# Altium PCB ESP32 with USBC.PcbDoc (part 1 of 3)
Units mil, origin at the board's own origin, x right, y up, seen from the top; angles counter-clockwise.
Board outline 2700 x 1000 mil, 4 copper layers (L1, L2, L3, L4), stack 61.583 mil thick; 64 components, 73 nets, 299 pads, 161 vias.
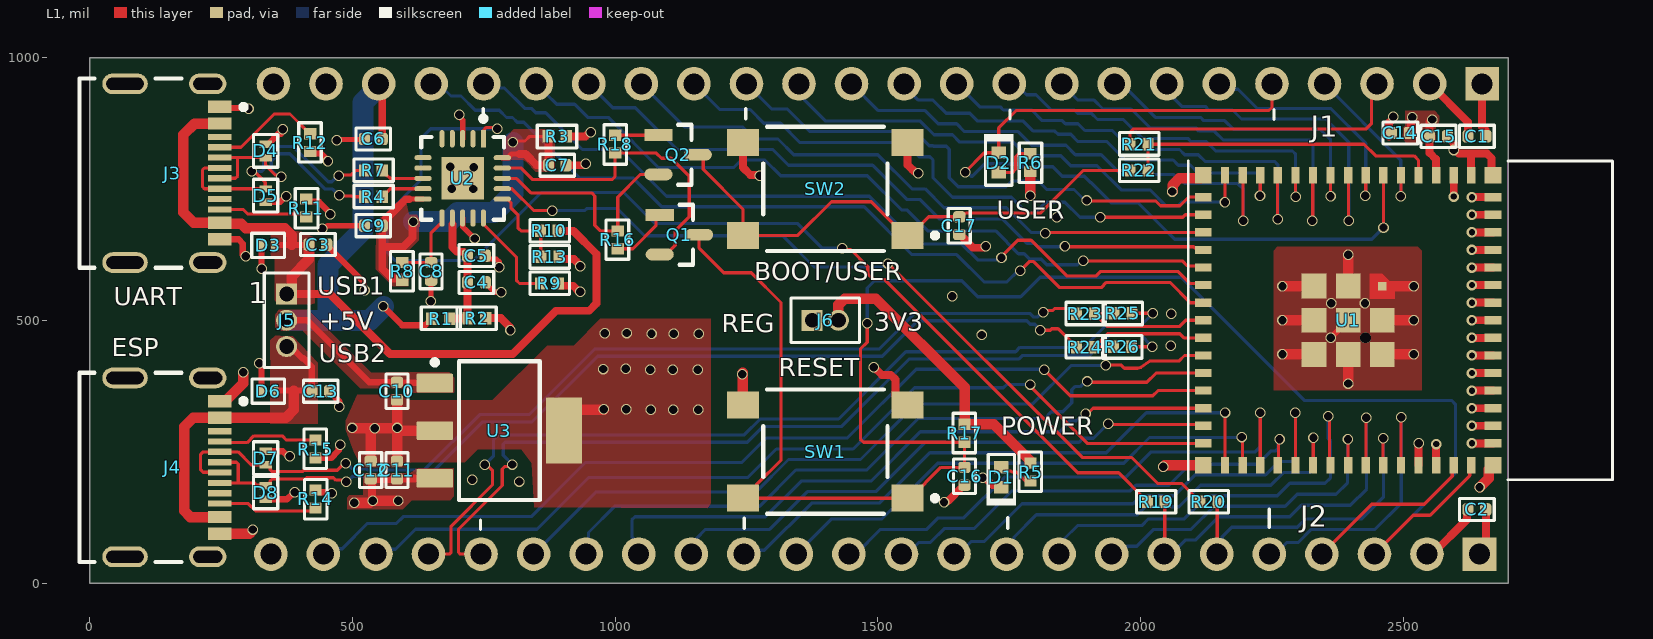
[diagram p0: L1 view]
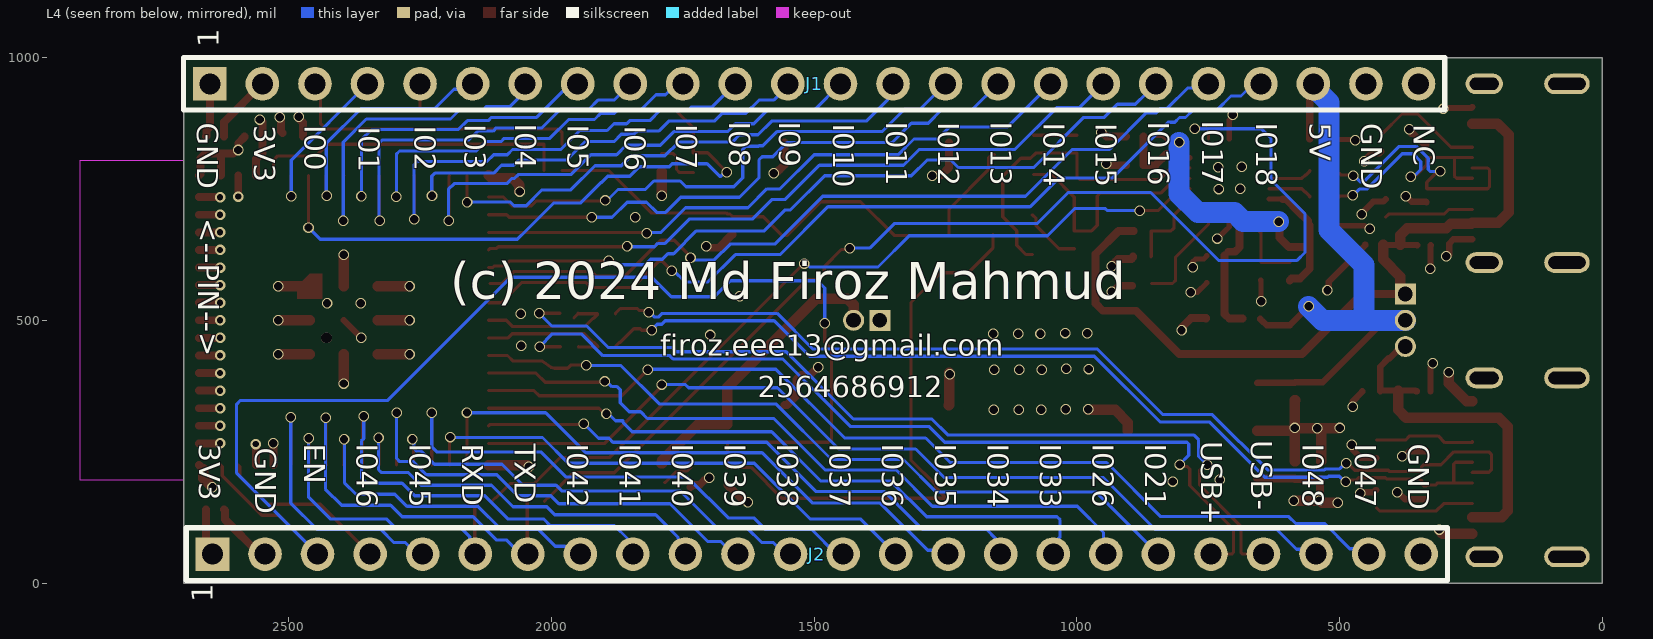
[diagram p1: L4 view, seen from below]
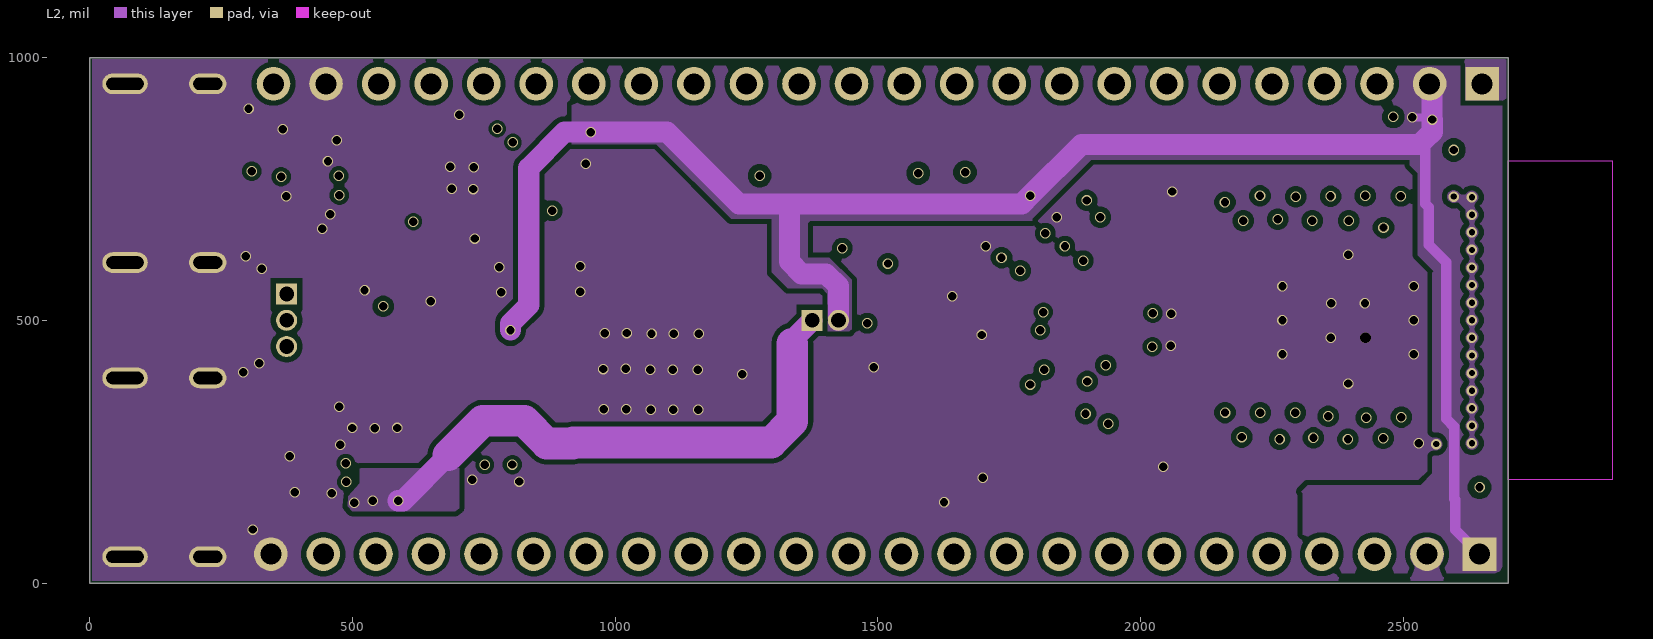
[diagram p2: L2]
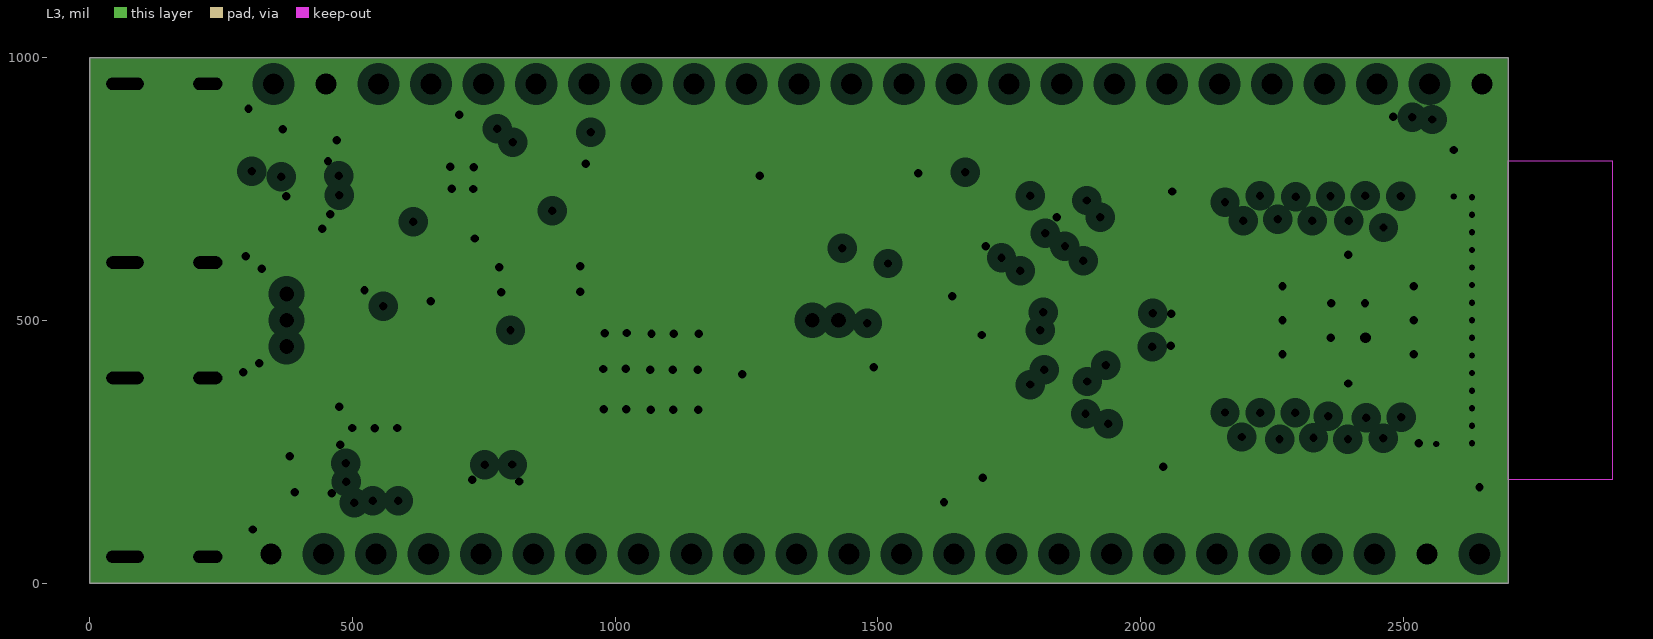
[diagram p3: L3, clearances drawn from the general rule]
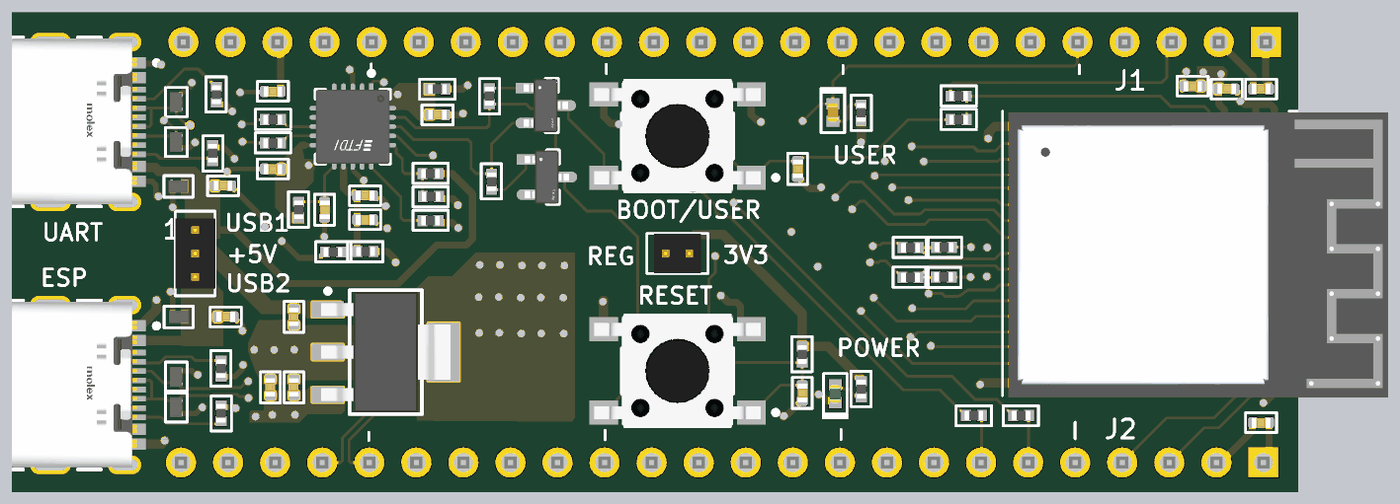
[diagram p5: 3D render of the assembled board from above, using the file's embedded part models]

## Layer stack, top to bottom
Top Solder: solder mask 0.4, Solder Resist, Dk 3.5
L1: signal copper 1.378
Dielectric 2: prepreg 3.9134, PP-006, Dk 4.1
L2: signal copper 0.5984
Dielectric 1: dielectric 49.8031, FR-4, Dk 4.8
L3: plane copper 0.5984, net GND
Dielectric 3: prepreg 3.9134, PP-006, Dk 4.1
L4: signal copper 1.378
Bottom Solder: solder mask 0.4, Solder Resist, Dk 3.5

## Board outline
0,0 2700,0 2700,1000 0,1000

## Design rules (kind name [scope] priority, off if disabled: settings)
Clearance SMALL [WithinRoom('FTDIII')   or WithinRoom('USBC2') or WithinRoom('USBC1')] p1: gap=6 ignorepadtopadclearanceinfootprint=FALSE
Clearance Smaller [WithinRoom('FTDI')] p2: gap=6 ignorepadtopadclearanceinfootprint=FALSE
Clearance "DIFF90 Clearance" [InDifferentialPairClass('DIFF90')] p3: gap=8 ignorepadtopadclearanceinfootprint=FALSE
Clearance [All] p4: gap=10 ignorepadtopadclearanceinfootprint=FALSE except(6: SMDPad-SMDPad)
ComponentClearance R1R2 [InComponent('R1') vs InComponent('R2')] p1: gap=0 collisioncheckmode=3 verticalgap=0 showdistances=TRUE
ComponentClearance R24R26 [InComponent('R24') vs InComponent('R26')] p2: gap=0 collisioncheckmode=3 verticalgap=0 showdistances=FALSE
ComponentClearance R23R25 [InComponent('R23') vs InComponent('R25')] p3: gap=0 collisioncheckmode=3 verticalgap=0 showdistances=FALSE
ComponentClearance [All] p4: gap=10 collisioncheckmode=3 verticalgap=10 showdistances=FALSE
DiffPairsRouting DIFF90 [InDifferentialPairClass('DIFF90')] p1: maxlimit=8.1 minlimit=8 mostfreqgap=8 toplayer_minwidth=6.03 toplayer_maxwidth=6.23 toplayer_prefwidth=6.03 midlayer1_minwidth=5.1 midlayer1_maxwidth=5.2 midlayer1_prefwidth=5.1 bottomlayer_minwidth=6.03 bottomlayer_maxwidth=6.23 bottomlayer_prefwidth=6.03 maxuncoupledlength=500
HoleToHoleClearance [All] p1: gap=3 allowstackedmicrovias=FALSE
MinimumSolderMaskSliver [All] p1: minsoldermaskwidth=3.15
PlaneClearance [All] p1: clearance=20
PlaneConnect [All] p1: pad.planeconnectstyle=Relief pad.reliefexpansion=20 pad.reliefentries=4 pad.reliefconductorwidth=20 pad.reliefairgap=10 via.planeconnectstyle=Direct via.reliefexpansion=20 via.reliefentries=4 via.reliefconductorwidth=10 via.reliefairgap=10
PolygonConnect [All] p1: connectstyle=Direct reliefconductorwidth=10 reliefentries=4 polygonreliefangle="90 Angle" airgapwidth=10
RoomDefinition USBC2 [False vs False] p1: confinementstyle=ConfineIn formatcopy=TRUE lockcomponents=FALSE outline 171.7,365.03 325.47,365.03 325.47,75.18 171.7,75.18
RoomDefinition FTDIII [False vs False] p2: confinementstyle=ConfineIn formatcopy=TRUE lockcomponents=FALSE outline 579.15,899.98 813.16,899.98 813.16,662.31 579.15,662.31
RoomDefinition USBC1 [False vs False] p3: confinementstyle=ConfineIn formatcopy=TRUE lockcomponents=FALSE outline 158.34,924.41 302.65,924.41 302.65,632.01 158.34,632.01
RoutingVias [All] p1: holewidth=24 width=10 viastyle="Through Hole" minholewidth=10 minwidth=10 maxholewidth=30 maxwidth=20
SilkToSolderMaskClearance [IsPad] p1: minsilkscreentomaskgap=0 clearancetoexposedcopper=TRUE
SolderMaskExpansion [All] p1: expansion=2 istentingtop=FALSE
SupplyNets "Schematic Supply Nets_5" [InNet('+3V3_REG')] p1: voltage=0.000
SupplyNets "Schematic Supply Nets_4" [InNet('+3V3')] p2: voltage=0.000
SupplyNets "Schematic Supply Nets_3" [InNet('+5V')] p3: voltage=0.000
SupplyNets "Schematic Supply Nets_2" [InNet('GND')] p4: voltage=0.000
SupplyNets "Schematic Supply Nets_1" [InNet('+5V_VBUS2')] p5: voltage=0.000
SupplyNets "Schematic Supply Nets" [InNet('+5V_VBUS1')] p6: voltage=0.000
Width [All] p1: maxlimit=100 minlimit=6 preferedwidth=10 minimp=50.000000 maximp=50.000000 favimp=50.000000
23 further rules are at their usual default settings.

## Classes and differential pairs
differential pair class DIFF90: CON1_USB CON2_USB CON_ESP_USB ESP_USB FTDI_USB
differential pair FTDI_USB: +FTDI_USB_P -FTDI_USB_N
differential pair ESP_USB: +ESP_USB_P -ESP_USB_N
differential pair CON_ESP_USB: +CON_ESP_USB_P -CON_ESP_USB_N
differential pair CON2_USB: +CON2_USB_P -CON2_USB_N
differential pair CON1_USB: +CON1_USB_P -CON1_USB_N

## Components (designator, comment, footprint, x,y, rotation, side; value= is the part's Value field where it differs from the comment)
C1 "100nF, 50V" CAPC1005X55N 2640,850 r180 top
C2 "100nF, 50V" CAPC1005X55N 2640,140 r0 top
C3 "100nF, 50V" CAPC1005X55N 434.41,644.03 r180 top
C4 "4u7,16V" CAPC1005X55N 736.07,572 r0 top value=4.7uF
C5 "100nF, 50V" CAPC1005X55N 736.07,623 r180 top
C6 "100nF, 50V" CAPC1005X55N 540,845 r0 top
C7 "100nF, 50V" CAPC1005X55N 890,795 r180 top
C8 "100nF, 50V" CAPC1005X55N 650,593.07 r90 top
C9 "100nF, 50V" CAPC1005X55N 540,680 r0 top
C10 "4u7,16V" CAPC1005X55N 585,365 r270 top value=4.7uF
C11 "10uF, 10V" CAPC1005X55N 585,215 r270 top locked value=10uF
C12 "10uF, 10V" CAPC1005X55N 535,215 r270 top locked value=10uF
C13 "100nF, 50V" CAPC1005X55N 440,365 r180 top
C14 "10uF, 10V" CAPC1005X55N 2494.54,856.42 r0 top value=10uF
C15 "100nF, 50V" CAPC1005X55N 2566.93,850 r180 top
C16 "1uF, 35V*" CAPC1005X55N 1665,203.07 r90 top value=1uF
C17 "100nF, 50V" CAPC1005X55N 1655,680 r90 top
D1 "GREEN" LED0402G 1735,201.3 r90 top
D2 "RED" LED0402R 1730,800 r270 top
D3 "AQ3045-01ETG" SOD882 339.66,642.61 r0 top
D4 "AQ3045-01ETG" SOD882 335,822.2 r270 top
D5 "AQ3045-01ETG" SOD882 335,737.2 r270 top
D6 "AQ3045-01ETG" SOD882 340,365 r0 top
D7 "AQ3045-01ETG" SOD882 335,237.8 r270 top
D8 "AQ3045-01ETG" SOD882 335,172.2 r270 top
J1 "0022284245" HDR_1X24_2.54MM 1500,950 r90 bottom locked
J2 "0022284245" HDR_1X24_2.54MM 1495,55 r90 bottom locked
J3 "217179-0001" FP-2171790001-MFG 112.8,779.92 r270 top locked
J4 "217179-0001" FP-2171790001-MFG 112.8,220.08 r270 top locked
J5 "FTS-103-01-F-S" HDR_1X3_1.27MM 375,550 r0 top locked
J6 "FTS-102-01-F-S" HDR_1X2_1.27MM 1375,500 r90 top locked
Q1 "SS8050-G" FP-SS8050-G-IPC_B 1122.42,662.6 r0 top
Q2 "SS8050-G" FP-SS8050-G-IPC_B 1120,815 r0 top
R1 "0R" RESC1005X37N 668.07,503.13 r0 top
R2 "0R" RESC1005X37N 737.06,504.22 r180 top
R3 "0R" RESC1005X37N 890,850 r180 top
R4 "27R" RESC1005X37N 540,735 r0 top
R5 "1K" RESC1005X37N 1790.55,211.13 r90 top value=1kR
R6 "1K" RESC1005X37N 1790,800 r270 top value=1kR
R7 "27R" RESC1005X37N 540,785 r0 top
R8 "0R" RESC1005X37N 595,592.99 r90 top
R9 "10K" RESC1005X37N 875.01,570 r0 top value=10kR
R10 "4K7" RESC1005X37N 875,670 r0 top value=4.7kR
R11 "5K1" RESC1005X37N 412.41,713.45 r270 top value=5.1kR
R12 "5K1" RESC1005X37N 420,837.99 r90 top value=5.1kR
R13 "10K" RESC1005X37N 876.01,621 r180 top value=10kR
R14 "5K1" RESC1005X37N 430,160 r270 top value=5.1kR
R15 "5K1" RESC1005X37N 430,255 r90 top value=5.1kR
R16 "10K" RESC1005X37N 1005,652.99 r90 top value=10kR
R17 "10K" RESC1005X37N 1665,285 r90 top value=10kR
R18 "10K" RESC1005X37N 1000,835 r270 top value=10kR
R19 "0R" RESC1005X37N 2030,155 r180 top
R20 "0R" RESC1005X37N 2130,155 r180 top
R21 "27R" RESC1005X37N 1997.01,835 r0 top
R22 "27R" RESC1005X37N 1997.01,785 r0 top
R23 "0R" RESC1005X37N 1895.14,512.35 r0 top
R24 "0R" RESC1005X37N 1894.97,449.02 r0 top
R25 "0R" RESC1005X37N 1966.45,513.37 r180 top
R26 "0R" RESC1005X37N 1965.47,449.75 r180 top
SW1 "PTS645SH50SMTR92LFS" FP-PTS645SH50SMTR92LFS-MFG 1400,250 r180 top locked
SW2 "PTS645SH50SMTR92LFS" FP-PTS645SH50SMTR92LFS-MFG 1400,750 r180 top locked
U1 "ESP32-S3-MINI-1-N8" XCVR_ESP32-S3-MINI-1-N8 2395.04,500 r270 top locked
U2 "FT231XQ-R" FP-QFN-20-IPC_B 710,770 r270 top locked
U3 "TL1963A-33DCYR" DCY0004A_N 780,290 r0 top locked

## Footprints (in the part's own frame and the unit in brackets; to place one, negate y for a bottom-side part, rotate by r counter-clockwise, add the part's x,y. Pads: shape width x height; smd on the part's side, far side on the other; paste and mask are expansions set on the pad)
CAPC1005X55N [mm]
  rrect53% 0.54x0.6 smd: 1(-0.43,0) 2(0.43,0)
  silkscreen extent -0.84,-0.53 0.84,0.53, body extent -0.5,-0.3 0.5,0.25, height 0.49
DCY0004A_N [mm] "SOT223, 4-Leads, Body 6.7x3.7mm, Pitch 2.3mm, IPC Medium Density"
  rrect11% 1.75x0.9 smd: 1(-3.125,2.3) 2(-3.125,0) 3(-3.125,-2.3)
  rrect6% 1.75x3.2 smd: 4(3.125,0)
  silkscreen extent -3.25,-3.35 1.95,3.42, body extent -3.5,-3.25 3.5,3.25, height 1.62
FP-2171790001-MFG [mm]
  rect 0.6x1.15 smd paste+0 mask+0: A1B12(-3.2,3.425) A4B9(-2.4,3.425) B1A12(3.2,3.425) B4A9(2.4,3.425)
  rect 0.3x1.15 smd paste+0 mask+0: A5(-1.25,3.425) A6(-0.25,3.425) A7(0.25,3.425) A8(1.25,3.425) B5(1.75,3.425) B6(0.75,3.425) B7(-0.75,3.425) B8(-1.75,3.425)
  rrect100% 1x1.8 hole 1.4 slot 0.6 at 0 deg paste-2539.97 mask+0: S1(-4.32,2.85) S2(4.32,2.85)
  rrect100% 1x2.2 hole 1.8 slot 0.6 at 0 deg paste-2539.97 mask+0: S3(-4.32,-1.15) S4(4.32,-1.15)
  silkscreen extent -4.57,-3.35 4.57,4.7, body extent -4.95,-3.44 4.89,4.11, height 0.25
FP-PTS645SH50SMTR92LFS-MFG [mm]
  rect 1.55x1.3 smd paste+0 mask+0: 1(-3.975,2.25) 2(3.975,2.25) 3(-3.975,-2.25) 4(3.975,-2.25)
  silkscreen extent -5.43,-3 3,3, body extent -4.5,-3 4.5,3, height 4.3
FP-QFN-20-IPC_B [mm]
  rect 0.84x0.242 smd paste+0 mask+0: 1(-1.916,1)
  rrect100% 0.84x0.242 smd paste+0 mask+0: 2(-1.916,0.5) 3(-1.916,0) 4(-1.916,-0.5) 5(-1.916,-1) 11(1.916,-1) 12(1.916,-0.5) 13(1.916,0) 14(1.916,0.5) 15(1.916,1)
  rrect100% 0.242x0.84 smd paste+0 mask+0: 6(-1,-1.916) 7(-0.5,-1.916) 8(0,-1.916) 9(0.5,-1.916) 10(1,-1.916) 16(1,1.916) 17(0.5,1.916) 18(0,1.916) 19(-0.5,1.916) 20(-1,1.916)
  rect 2.05x2.05 smd paste-1000 mask+0: 21(0,0)
  silkscreen extent -3.01,-2 2,2, body extent -2.59,-2.59 2.59,2.59, height 0.25
FP-SS8050-G-IPC_B [mm]
  rect 1.357x0.572 smd paste+0 mask+0: 1(-0.951,0.95)
  rrect100% 1.357x0.572 smd paste+0 mask+0: 2(-0.951,-0.95) 3(0.951,0)
  silkscreen extent 0,-1.45 0.65,1.45, body extent -1.88,-1.7 1.88,1.7, height 0.25
HDR_1X2_1.27MM [mil]
  rect 40x40 hole 28: 1(0,0)
  round 40 hole 28: 2(0,-50)
  silkscreen extent -42,-90 43,40, body extent -42,-75 43,25, height 154
HDR_1X3_1.27MM [mil]
  rect 40x40 hole 28: 1(0,0)
  round 40 hole 28: 2(0,-50) 3(0,-100)
  silkscreen extent -42,-140 42,40, body extent -42,-125 42,25, height 154
HDR_1X24_2.54MM [mil]
  rect 64x64 hole 40: 1(0,1150)
  round 64 hole 40: 2(0,1050) 3(0,950) 4(0,850) 5(0,750) 6(0,650) 7(0,550) 8(0,450) 9(0,350) 10(0,250) 11(0,150) 12(0,50) 13(0,-50) 14(0,-150) 15(0,-250) 16(0,-350) 17(0,-450) 18(0,-550) 19(0,-650) 20(0,-750) 21(0,-850) 22(0,-950) 23(0,-1050) 24(0,-1150)
  silkscreen extent -50,-1200 50,1200, body extent -49,-1200 49,1200, height 340
LED0402G [mm]
  rect 0.6x0.7 smd: 1(-0.475,0) 2(0.475,0)
  silkscreen extent -1.37,-0.71 1.09,0.71, body extent -0.5,-0.3 0.5,0.3, height 0.2
LED0402R [mm]
  rect 0.6x0.7 smd: 1(-0.475,0) 2(0.475,0)
  silkscreen extent -1.37,-0.71 1.09,0.71, body extent -0.5,-0.3 0.5,0.3, height 0.2
RESC1005X37N [mm]
  rect 0.54x0.6 smd: 1(-0.432,0) 2(0.432,0)
  silkscreen extent -0.94,-0.53 0.97,0.56, body extent -0.5,-0.25 0.5,0.25, height 0.37
SOD882 [mm]
  rect 0.35x0.6 smd: 1(-0.325,0) 2(0.325,0)
  silkscreen extent -0.79,-0.58 0.79,0.58, body extent -0.54,-0.34 0.54,0.34, height 0.44
XCVR_ESP32-S3-MINI-1-N8 [mm]
  rect 0.8x0.4 smd: 1(-7,5.95) 2(-7,5.1) 3(-7,4.25) 4(-7,3.4) 5(-7,2.55) 6(-7,1.7) 7(-7,0.85) 8(-7,0) 9(-7,-0.85) 10(-7,-1.7) 11(-7,-2.55) 12(-7,-3.4) 13(-7,-4.25) 14(-7,-5.1) 15(-7,-5.95) 31(7,-5.95) 32(7,-5.1) 33(7,-4.25) 34(7,-3.4) 35(7,-2.55) 36(7,-1.7) 37(7,-0.85) 38(7,0) 39(7,0.85) 40(7,1.7) 41(7,2.55) 42(7,3.4) 43(7,4.25) 44(7,5.1) 45(7,5.95)
  rect 0.4x0.8 smd: 16(-5.95,-7) 17(-5.1,-7) 18(-4.25,-7) 19(-3.4,-7) 20(-2.55,-7) 21(-1.7,-7) 22(-0.85,-7) 23(0,-7) 24(0.85,-7) 25(1.7,-7) 26(2.55,-7) 27(3.4,-7) 28(4.25,-7) 29(5.1,-7) 30(5.95,-7) 46(5.95,7) 47(5.1,7) 48(4.25,7) 49(3.4,7) 50(2.55,7) 51(1.7,7) 52(0.85,7) 53(0,7) 54(-0.85,7) 55(-1.7,7) 56(-2.55,7) 57(-3.4,7) 58(-4.25,7) 59(-5.1,7) 60(-5.95,7)
  rect 1.2x1.2 smd: 61(0,0) 67(0,1.65) 68(1.65,1.65) 69(-1.65,0) 70(1.65,0) 71(-1.65,-1.65) 72(0,-1.65) 73(1.65,-1.65)
  rect 0.8x0.8 smd: 62(-7,7) 63(-7,-7) 64(7,-7) 65(7,7)
  rect 0.4x0.4 smd paste-1 mask+0: 66(-1.65,1.65)
  L1 region: -1.05,1.05 -2.25,1.05 -2.25,1.65 -1.65,2.25 -1.05,2.25
  Keep-Out Layer region: 7.7,7.725 -7.7,7.725 -7.7,12.775 7.7,12.775
  Keep-Out Layer region: 7.7,7.725 -7.7,7.725 -7.7,12.775 7.7,12.775
  silkscreen extent -7.7,-7.73 7.7,12.78, body extent -7.63,-7.42 7.77,13.08, height 2.55

## Part data
C1 C2 C3 C5 C6 C7 C8 C9 C13 C15 C17: library part CL05B104KB54PNC, "CAP CER 0.1UF 50V X7R 0402", Capacitor Type=Ceramic, LCSC Part Number=C307331, Manufacturer=Samsung, Supplier Part Number=1276-CL05B104KB54PNCCT-ND, Category="Ceramic Capacitors", ComponentLink1Description=https://datasheet.ciiva.com:443/pdfs/VipMasterIC/IC/SEMS/SEMS-S-A0006318249/SEMS-S-A0006320959-1.pdf?src-supplier=IHS+Markit, ComponentLink1URL=https://datasheet.ciiva.com:443/pdfs/VipMasterIC/IC/SEMS/SEMS-S-A0006318249/SEMS-S-A0006320959-1.pdf?src-supplier=IHS+Markit, ComponentLink2Description=https://datasheet.octopart.com/CL05B104KB54PNC-Samsung-datasheet-8326407.pdf?src-supplier=TME, ComponentLink2URL=https://datasheet.octopart.com/CL05B104KB54PNC-Samsung-datasheet-8326407.pdf?src-supplier=TME, Dielectric Material=Ceramic, Manufacturer Part Number=CL05B104KB54PNC, Pins=2, Pricing="1=0.1, 10=0.036, 50=0.0244, 100=0.0209, 500=0.01492, 1000=0.01307, 2500=0.0111, 5000=0.00992, 10000=0.00894, 20000=0.00812, 30000=0.00772, 50000=0.00726, 70000=0.007, 100000=0.00674, 250000=0.00618, 500000=0.00585, 1000000=0.00557 (USD)", Reach SVHC Compliant=Yes, RoHS=Yes, RoHS Compliant=Yes, Stock=1671295, Supplier=Digikey
C4 C10: library part CL05A475MO5NUNC, "CAP CER 4.7UF 16V X5R 0402", Capacitor Type=Ceramic, Case/Package=0402, LCSC Part Number=C318563, Manufacturer=Samsung, Max Operating Temperature=85°C, Min Operating Temperature=-55°C, Package Shape=Rectangular, Package Style=SMTMeter, Rated DC Voltage (URdc)=16V, Supplier Part Number=1276-6836-1-ND, Temperature Characteristics Code=X5R, Tolerance  (fill in as +-)=20%, Category="Ceramic Capacitors", ComponentLink1Description=https://datasheet.ciiva.com:443/pdfs/VipMasterIC/IC/SEMS/SEMS-S-A0008384515/SEMS-S-A0008898881-1.pdf?src-supplier=IHS+Markit, ComponentLink1URL=https://datasheet.ciiva.com:443/pdfs/VipMasterIC/IC/SEMS/SEMS-S-A0008384515/SEMS-S-A0008898881-1.pdf?src-supplier=IHS+Markit, ComponentLink2Description=http://www.farnell.com/datasheets/2710653.pdf?src-supplier=Farnell, ComponentLink2URL=http://www.farnell.com/datasheets/2710653.pdf?src-supplier=Farnell, ComponentLink3Description=http://www.samsungsem.com/kr/support/product-search/mlcc/CL05A475MO5NUNC.jsp?src-supplier=Digikey, ComponentLink3URL=http://www.samsungsem.com/kr/support/product-search/mlcc/CL05A475MO5NUNC.jsp?src-supplier=Digikey, ComponentLink4Description=http://www.farnell.com/datasheets/2710653.pdf?src-supplier=Newark, ComponentLink4URL=http://www.farnell.com/datasheets/2710653.pdf?src-supplier=Newark, ComponentLink5Description=http://www.farnell.com/datasheets/2710653.pdf?src-supplier=Element14, ComponentLink5URL=http://www.farnell.com/datasheets/2710653.pdf?src-supplier=Element14, ComponentLink6Description=https://datasheet.octopart.com/CL05A475MO5NUNC-Samsung-Electro-Mechanics-datasheet-123102911.pdf?src-supplier=Future+Electronics, ComponentLink6URL=https://datasheet.octopart.com/CL05A475MO5NUNC-Samsung-Electro-Mechanics-datasheet-123102911.pdf?src-supplier=Future+Electronics, Dielectric Material=Ceramic, Height=0.7mm, JESD-609 Code=e3, Length=1mm, Manufacturer Part Number=CL05A475MO5NUNC, Mounting Technology="Surface Mount", Multilayer=Yes, Packaging="Tape and Reel", Pins=2, Pricing="1=0.43, 10=0.252, 50=0.1826, 100=0.161, 500=0.12446, 1000=0.11305, 2500=0.10094, 5000=0.0936, 10000=0.08752, 20000=0.08248, 30000=0.07994, 50000=0.07712, 70000=0.07547, 100000=0.07387 (USD)", Reach SVHC Compliant=Yes, RoHS=Yes, RoHS Compliant=Yes, Stock=211473, Supplier=Digikey, Terminal Finish=Nickel, Termination=Wraparound, Tolerance (fill in as +-)=20%, Width=0.5mm
C11 C12 C14: library part CL05A106MP8NUB8, "CAP CER 10UF 10V X5R 0402", Capacitor Type=Ceramic, Case/Package=0402, LCSC Part Number=C307415, Manufacturer=Samsung, Max Operating Temperature=85°C, Min Operating Temperature=-55°C, Package Shape=Rectangular, Rated DC Voltage (URdc)=10V, Supplier Part Number=1276-6830-1-ND, Temperature Characteristics Code=X5R, Tolerance  (fill in as +-)=20%, Category="Ceramic Capacitors", ComponentLink1Description=https://datasheet.ciiva.com:443/pdfs/VipMasterIC/IC/SEMS/SEMS-S-A0008521219/SEMS-S-A0008521325-1.pdf?src-supplier=IHS+Markit, ComponentLink1URL=https://datasheet.ciiva.com:443/pdfs/VipMasterIC/IC/SEMS/SEMS-S-A0008521219/SEMS-S-A0008521325-1.pdf?src-supplier=IHS+Markit, ComponentLink2Description=http://www.samsungsem.com/kr/support/product-search/mlcc/CL05A106MP8NUB8.jsp?src-supplier=Digikey, ComponentLink2URL=http://www.samsungsem.com/kr/support/product-search/mlcc/CL05A106MP8NUB8.jsp?src-supplier=Digikey, ComponentLink3Description=https://datasheet.octopart.com/CL05A106MP8NUB8-Samsung-Electro-Mechanics-datasheet-136460857.pdf?src-supplier=Future+Electronics, ComponentLink3URL=https://datasheet.octopart.com/CL05A106MP8NUB8-Samsung-Electro-Mechanics-datasheet-136460857.pdf?src-supplier=Future+Electronics, Dielectric Material=Ceramic, JESD-609 Code=e3, Manufacturer Part Number=CL05A106MP8NUB8, Mounting Technology="Surface Mount", Multilayer=Yes, Packaging="Tape and Reel", Pins=2, Pricing="1=0.36, 10=0.21, 50=0.151, 100=0.1328, 500=0.1018, 1000=0.09216, 2500=0.08192, 8000=0.07211, 16000=0.06758, 24000=0.0653, 40000=0.06277, 56000=0.06128, 80000=0.05984 (USD)", Reach SVHC Compliant=Yes, RoHS=Yes, RoHS Compliant=Yes, Stock=623076, Supplier=Digikey, Terminal Finish=Nickel, Termination=Wraparound, Tolerance (fill in as +-)=20%
C16: library part CL05A105KL5NRNC, "CAP CER 1UF 35V X5R 0402", Capacitor Type=Ceramic, Case/Package=0402, LCSC Part Number=C307413, Manufacturer=Samsung, Max Operating Temperature=85°C, Min Operating Temperature=-55°C, Package Shape=Rectangular, Rated DC Voltage (URdc)=35V, Supplier Part Number=1276-6796-1-ND, Temperature Characteristics Code=X5R, Tolerance  (fill in as +-)=10%, Category="Ceramic Capacitors", ComponentLink1Description=https://datasheet.ciiva.com:443/pdfs/VipMasterIC/IC/SEMS/SEMS-S-A0008384515/SEMS-S-A0008872905-1.pdf?src-supplier=IHS+Markit, ComponentLink1URL=https://datasheet.ciiva.com:443/pdfs/VipMasterIC/IC/SEMS/SEMS-S-A0008384515/SEMS-S-A0008872905-1.pdf?src-supplier=IHS+Markit, ComponentLink2Description=http://www.samsungsem.com/kr/support/product-search/mlcc/CL05A105KL5NRNC.jsp?src-supplier=Digikey, ComponentLink2URL=http://www.samsungsem.com/kr/support/product-search/mlcc/CL05A105KL5NRNC.jsp?src-supplier=Digikey, ComponentLink3Description=https://datasheet.octopart.com/CL05A105KL5NRNC-Samsung-datasheet-8326407.pdf?src-supplier=TME, ComponentLink3URL=https://datasheet.octopart.com/CL05A105KL5NRNC-Samsung-datasheet-8326407.pdf?src-supplier=TME, Dielectric Material=Ceramic, JESD-609 Code=e3, Manufacturer Part Number=CL05A105KL5NRNC, Mounting Technology="Surface Mount", Multilayer=Yes, Packaging="Tape and Reel", Pins=2, Pricing="1=0.31, 10=0.181, 50=0.1296, 100=0.1136, 500=0.08658, 1000=0.07816, 2500=0.06921, 5000=0.06379, 10000=0.0593, 20000=0.05558, 30000=0.0537, 50000=0.05162, 70000=0.0504, 100000=0.04922 (USD)", Reach SVHC Compliant=Yes, RoHS=Yes, RoHS Compliant=Yes, Stock=309548, Supplier=Digikey, Terminal Finish=Nickel, Termination=Wraparound, Tolerance (fill in as +-)=10%
D1: library part VLMG1500-GS08, "LED YLW-GRN 0402 SMD", Color=Green,Yellow, Color@wavelength=Green, Forward Current=30mA, Forward Voltage=2.4V, LCSC Part Number=C511404, Manufacturer=Vishay, Max Operating Temperature=85°C, Min Operating Temperature=-30°C, Reverse Voltage-Max=5V, Supplier Part Number=VLMG1500-GS08CT-ND, Category=LEDs, Channels=1, ComponentLink1Description=https://datasheet.ciiva.com:443/pdfs/VipMasterIC/IC/VISH/VISH-S-A0003457490/VISH-S-A0003457490-1.pdf?src-supplier=IHS+Markit, ComponentLink1URL=https://datasheet.ciiva.com:443/pdfs/VipMasterIC/IC/VISH/VISH-S-A0003457490/VISH-S-A0003457490-1.pdf?src-supplier=IHS+Markit, ComponentLink2Description=https://datasheet.ciiva.com/12071/vlmo1500-244705-12071911.pdf?src-supplier=Mouser, ComponentLink2URL=https://datasheet.ciiva.com/12071/vlmo1500-244705-12071911.pdf?src-supplier=Mouser, ComponentLink3Description=https://datasheet.ciiva.com/13945/vlmo1500-13945360.pdf?src-supplier=Digikey, ComponentLink3URL=https://datasheet.ciiva.com/13945/vlmo1500-13945360.pdf?src-supplier=Digikey, ComponentLink4Description=https://datasheet.ciiva.com/30005/vlmo1500-30005134.pdf?src-supplier=Avnet, ComponentLink4URL=https://datasheet.ciiva.com/30005/vlmo1500-30005134.pdf?src-supplier=Avnet, ComponentLink5Description=https://datasheet.ciiva.com/13945/vlmo1500-13945358.pdf?src-supplier=Digikey, ComponentLink5URL=https://datasheet.ciiva.com/13945/vlmo1500-13945358.pdf?src-supplier=Digikey, ComponentLink6Description=https://datasheet.ciiva.com/13945/vlmo1500-13945359.pdf?src-supplier=Digikey, ComponentLink6URL=https://datasheet.ciiva.com/13945/vlmo1500-13945359.pdf?src-supplier=Digikey, Luminous Intensity-Nom=90mcd, Manufacturer Part Number=VLMG1500-GS08, Mounting Technology="Surface Mount", Optoelectronic Device Type="SINGLE COLOR LED", Overall Height=0.35mm, Packaging="Tape and Reel", Pins=2, Pricing="1=0.34, 10=0.265, 100=0.119, 500=0.10746, 1000=0.08827 (USD)", Reach SVHC Compliant=Yes, RoHS=Yes, RoHS Compliant=Yes, Shape=Rectangular, Size=0.5mm, Stock=85171, Supplier=Digikey, Terminal Pitch=0.95mm, Viewing Angle=130°
D2: library part VLMS1500-GS08, "LED RED 0402 SMD", Color=Red, Forward Current=30mA, Forward Voltage=2.4V, LCSC Part Number=C511370, Manufacturer=Vishay, Max Operating Temperature=85°C, Min Operating Temperature=-30°C, Reverse Voltage-Max=5V, Supplier Part Number=VLMS1500-GS08CT-ND, Category=LEDs, Channels=1, Color@wavelength=Red, ComponentLink1Description=https://datasheet.ciiva.com:443/pdfs/VipMasterIC/IC/VISH/VISH-S-A0003457490/VISH-S-A0003457490-1.pdf?src-supplier=IHS+Markit, ComponentLink1URL=https://datasheet.ciiva.com:443/pdfs/VipMasterIC/IC/VISH/VISH-S-A0003457490/VISH-S-A0003457490-1.pdf?src-supplier=IHS+Markit, ComponentLink2Description=https://datasheet.ciiva.com/13945/vlmo1500-13945367.pdf?src-supplier=Digikey, ComponentLink2URL=https://datasheet.ciiva.com/13945/vlmo1500-13945367.pdf?src-supplier=Digikey, ComponentLink3Description=https://datasheet.ciiva.com/13945/vlmo1500-13945368.pdf?src-supplier=Digikey, ComponentLink3URL=https://datasheet.ciiva.com/13945/vlmo1500-13945368.pdf?src-supplier=Digikey, ComponentLink4Description=https://datasheet.ciiva.com/13945/vlmo1500-13945369.pdf?src-supplier=Digikey, ComponentLink4URL=https://datasheet.ciiva.com/13945/vlmo1500-13945369.pdf?src-supplier=Digikey, Luminous Intensity-Nom=54mcd, Manufacturer Part Number=VLMS1500-GS08, Mounting Technology="Surface Mount", Optoelectronic Device Type="SINGLE COLOR LED", Overall Height=0.35mm, Packaging="Tape and Reel", Pins=2, Pricing="1=0.33, 10=0.188, 100=0.1158, 500=0.0878, 1000=0.07922 (USD)", Reach SVHC Compliant=Yes, RoHS=Yes, RoHS Compliant=Yes, Shape=Rectangular, Size=0.5mm, Stock=7464, Supplier=Digikey, Terminal Pitch=0.95mm, Viewing Angle=130°
D3 D4 D5 D6 D7 D8: "TVS DIODE 5.3VWM 12VC SOD882", LCSC Part Number=C3710326, Manufacturer=Littelfuse, Max Breakdown Voltage=9V, Max Operating Temperature=150°C, Min Breakdown Voltage=6.8V, Min Operating Temperature=-55°C, Non-rep Peak Rev Power Dis-Max=40W, Package Body Material=Plastic, Package Shape=Rectangular, Package Style="CHIP CARRIERMeter", Rep Pk Reverse Voltage-Max=5.3V, Supplier Part Number=F9321CT-ND, Category="TVS Diodes", ComponentLink1Description=https://datasheet.ciiva.com:443/pdfs/VipMasterIC/IC/LFSI/LFSI-S-A0007892042/LFSI-S-A0007892042-1.pdf?src-supplier=IHS+Markit, ComponentLink1URL=https://datasheet.ciiva.com:443/pdfs/VipMasterIC/IC/LFSI/LFSI-S-A0007892042/LFSI-S-A0007892042-1.pdf?src-supplier=IHS+Markit, ComponentLink2Description=http://www.littelfuse.com/~/media/electronics/datasheets/tvs_diode_arrays/littelfuse_tvs_diode_array_aq3045_datasheet.pdf.pdf?src-supplier=Digikey, ComponentLink2URL=http://www.littelfuse.com/~/media/electronics/datasheets/tvs_diode_arrays/littelfuse_tvs_diode_array_aq3045_datasheet.pdf.pdf?src-supplier=Digikey, ComponentLink3Description=https://www.littelfuse.com/~/media/electronics/datasheets/tvs_diode_arrays/littelfuse_tvs_diode_array_aq3045_datasheet.pdf.pdf?src-supplier=Digikey, ComponentLink3URL=https://www.littelfuse.com/~/media/electronics/datasheets/tvs_diode_arrays/littelfuse_tvs_diode_array_aq3045_datasheet.pdf.pdf?src-supplier=Digikey, ComponentLink4Description=https://datasheet.octopart.com/AQ3045-01ETG-Littelfuse-datasheet-101609968.pdf?src-supplier=Farnell, ComponentLink4URL=https://datasheet.octopart.com/AQ3045-01ETG-Littelfuse-datasheet-101609968.pdf?src-supplier=Farnell, ComponentLink5Description=https://datasheet.octopart.com/AQ3045-01ETG-Littelfuse-datasheet-140480283.pdf?src-supplier=Future+Electronics, ComponentLink5URL=https://datasheet.octopart.com/AQ3045-01ETG-Littelfuse-datasheet-140480283.pdf?src-supplier=Future+Electronics, Diode Element Material=SILICON, Diode Type="TRANS VOLTAGE SUPPRESSOR", Manufacturer Part Number=AQ3045-01ETG, Number of Elements=1, Pins=2, Polarity=Bidirectional, Pricing="1=0.48, 10=0.321, 100=0.2174, 500=0.16954, 1000=0.15367, 2000=0.14015, 5000=0.12532 (USD)", Reach SVHC Compliant=Yes, Reference Standard=AEC-Q101, RoHS=Yes, RoHS Compliant=Yes, Stock=18103, Supplier=Digikey, Surface Mount=Yes, Technology=AVALANCHE, Terminal Form="No Lead", Terminal Position=BOTTOM
J1 J2: "CONN HEADER VERT 24POS 2.54MM", Flammability Rating="UL94 V-0", LCSC Part Number=C7145888, Manufacturer=Molex, Supplier Part Number=900-0022284245-ND, ComponentLink1Description=https://datasheet.ciiva.com:443/pdfs/VipMasterIC/IC/MOLE/MOLE-S-A0006764423/MOLE-S-A0006877704-1.pdf?src-supplier=IHS+Markit, ComponentLink1URL=https://datasheet.ciiva.com:443/pdfs/VipMasterIC/IC/MOLE/MOLE-S-A0006764423/MOLE-S-A0006877704-1.pdf?src-supplier=IHS+Markit, ComponentLink2Description=https://datasheet.ciiva.com/6814/022284363-sd-6814049.pdf?src-supplier=Digikey, ComponentLink2URL=https://datasheet.ciiva.com/6814/022284363-sd-6814049.pdf?src-supplier=Digikey, ComponentLink3Description=https://datasheet.ciiva.com/10075/0022284245-pcb-headers-10075617.pdf?src-supplier=Avnet, ComponentLink3URL=https://datasheet.ciiva.com/10075/0022284245-pcb-headers-10075617.pdf?src-supplier=Avnet, ComponentLink4Description=https://datasheet.ciiva.com/5153/0022284245-pcb-headers-228340-5153875.pdf?src-supplier=Mouser, ComponentLink4URL=https://datasheet.ciiva.com/5153/0022284245-pcb-headers-228340-5153875.pdf?src-supplier=Mouser, ComponentLink5Description=https://datasheet.ciiva.com/1433/1597854-1433759.pdf?src-supplier=Element14, ComponentLink5URL=https://datasheet.ciiva.com/1433/1597854-1433759.pdf?src-supplier=Element14, Connector Type="BOARD CONNECTOR", Contact Finish - Mating=GOLD, Contact Finish - Termination="Tin (Sn)", Contact Gender=Male, Contact Material=Brass, DIN Conformance=No, Filter Feature=No, IEC Conformance=No, JESD-609 Code=e3, Manufacturer Part Number=0022284245, Mating Information="MULTIPLE MATING PARTS AVAILABLE", MIL Conformance=No, Mixed Contacts=No, Mounting Style=STRAIGHT, Mounting Technology=Board, Number of Contacts=24, Number of Rows Loaded=1, Option="General Purpose", Pricing="1=1.45, 10=1.091, 100=0.8495, 500=0.73094, 1000=0.68963, 5000=0.61174, 10000=0.58469 (USD)", Reach SVHC Compliant=Yes, RoHS=Yes, RoHS Compliant=Yes, Stock=2893, Supplier=Digikey, Terminal Pitch=2.54mm, Termination=Solder
J3 J4: "CONN RCP USB2.0 TYP C 24P SMD RA", LCSC Part Number=C3197684, Manufacturer=Molex, Supplier Part Number=900-2171790001CT-ND, Category=Connectors, Manufacturer Part Number=217179-0001, Pricing="1=0.98, 10=0.731, 25=0.6564, 50=0.6074, 100=0.5642, 250=0.51468, 500=0.48234 (USD)", RoHS=No, Stock=13838, Supplier=Digikey
J5: "CONN HEADER VERT 3POS 1.27MM", Flammability Rating="UL94 V-0", LCSC Part Number=C3333578, Manufacturer=Samtec, Manufacturer Series=FTS, Supplier Part Number=612-FTS-103-01-F-S-ND, Additional Feature="Low Profile", Category=Connectors, ComponentLink1Description=https://datasheet.ciiva.com:443/pdfs/VipMasterIC/IC/SAMI/SAMI-S-A0001504673/SAMI-S-A0001504673-1.pdf?src-supplier=IHS+Markit, ComponentLink1URL=https://datasheet.ciiva.com:443/pdfs/VipMasterIC/IC/SAMI/SAMI-S-A0001504673/SAMI-S-A0001504673-1.pdf?src-supplier=IHS+Markit, ComponentLink2Description=http://www.samtec.com/documents/webfiles/pdf/FTS.pdf?src-supplier=Avnet, ComponentLink2URL=http://www.samtec.com/documents/webfiles/pdf/FTS.pdf?src-supplier=Avnet, ComponentLink3Description=http://suddendocs.samtec.com/prints/fts-1xx-xx-xx-xx-xx-mkt.pdf?src-supplier=Digikey, ComponentLink3URL=http://suddendocs.samtec.com/prints/fts-1xx-xx-xx-xx-xx-mkt.pdf?src-supplier=Digikey, ComponentLink4Description=https://datasheet.octopart.com/FTS-103-01-F-S-Samtec-datasheet-151470456.pdf?src-supplier=Sager+Electronics, ComponentLink4URL=https://datasheet.octopart.com/FTS-103-01-F-S-Samtec-datasheet-151470456.pdf?src-supplier=Sager+Electronics, ComponentLink5Description=https://datasheet.octopart.com/FTS-103-01-F-S-Samtec-datasheet-176663378.pdf?src-supplier=Toby+Electronics, ComponentLink5URL=https://datasheet.octopart.com/FTS-103-01-F-S-Samtec-datasheet-176663378.pdf?src-supplier=Toby+Electronics, Connector Type="BOARD CONNECTOR", Contact Finish - Mating="GOLD (3) OVER NICKEL (50)", Contact Finish - Termination="Matte Tin (Sn) - with Nickel (Ni) barrier", Contact Gender=Male, Contact Material=Bronze, DIN Conformance=No, Filter Feature=No, IEC Conformance=No, JESD-609 Code=e3, Manufacturer Part Number=FTS-103-01-F-S, MIL Conformance=No, Mixed Contacts=No, Mounting Style=STRAIGHT, Mounting Technology=Board, Number of Contacts=3, Number of Rows Loaded=1, Option="General Purpose", Pricing="1=0.73, 50=0.6378, 100=0.5407, 500=0.4491, 1000=0.38362, 2000=0.31431, 5000=0.2478, 10000=0.2375 (USD)", Reach SVHC Compliant=Yes, RoHS=Yes, RoHS Compliant=Yes, Stock=2707, Supplier=Digikey, Terminal Pitch=1.27mm, Termination=Solder
J6: "CONN HEADER VERT 2POS 1.27MM", Flammability Rating="UL94 V-0", LCSC Part Number=C6045317, Manufacturer=Samtec, Manufacturer Series=FTS, Supplier Part Number=SAM15176-ND, Additional Feature="Low Profile", Category=Connectors, ComponentLink1Description=https://datasheet.ciiva.com:443/pdfs/VipMasterIC/IC/SAMI/SAMI-S-A0001504673/SAMI-S-A0001504673-1.pdf?src-supplier=IHS+Markit, ComponentLink1URL=https://datasheet.ciiva.com:443/pdfs/VipMasterIC/IC/SAMI/SAMI-S-A0001504673/SAMI-S-A0001504673-1.pdf?src-supplier=IHS+Markit, ComponentLink2Description=http://suddendocs.samtec.com/catalog_english/fts.pdf?src-supplier=Digikey, ComponentLink2URL=http://suddendocs.samtec.com/catalog_english/fts.pdf?src-supplier=Digikey, ComponentLink3Description=http://www.samtec.com/documents/webfiles/pdf/FTS.pdf?src-supplier=Avnet, ComponentLink3URL=http://www.samtec.com/documents/webfiles/pdf/FTS.pdf?src-supplier=Avnet, ComponentLink4Description=https://datasheet.octopart.com/FTS-102-01-F-S-Samtec-datasheet-118493358.pdf?src-supplier=Electro+Sonic, ComponentLink4URL=https://datasheet.octopart.com/FTS-102-01-F-S-Samtec-datasheet-118493358.pdf?src-supplier=Electro+Sonic, ComponentLink5Description=https://datasheet.octopart.com/FTS-102-01-F-S-Samtec-datasheet-151470456.pdf?src-supplier=Sager+Electronics, ComponentLink5URL=https://datasheet.octopart.com/FTS-102-01-F-S-Samtec-datasheet-151470456.pdf?src-supplier=Sager+Electronics, ComponentLink6Description=https://datasheet.octopart.com/FTS-102-01-F-S-Samtec-datasheet-176663378.pdf?src-supplier=Toby+Electronics, ComponentLink6URL=https://datasheet.octopart.com/FTS-102-01-F-S-Samtec-datasheet-176663378.pdf?src-supplier=Toby+Electronics, Connector Type="BOARD CONNECTOR", Contact Finish - Mating="GOLD (3) OVER NICKEL (50)", Contact Finish - Termination="Matte Tin (Sn) - with Nickel (Ni) barrier", Contact Gender=Male, Contact Material=Bronze, DIN Conformance=No, Filter Feature=No, IEC Conformance=No, JESD-609 Code=e3, Manufacturer Part Number=FTS-102-01-F-S, MIL Conformance=No, Mixed Contacts=No, Mounting Style=STRAIGHT, Mounting Technology=Board, Number of Contacts=2, Number of Rows Loaded=1, Option="General Purpose", Pricing="1=0.49, 50=0.4252, 100=0.3608, 500=0.2994, 1000=0.25609, 2000=0.20954, 5000=0.16589, 10000=0.1625 (USD)", Reach SVHC Compliant=Yes, RoHS=Yes, RoHS Compliant=Yes, Stock=722, Supplier=Digikey, Terminal Pitch=1.27mm, Termination=Solder
Q1 Q2: "TRANS NPN 25V 1.5A SOT23-3", LCSC Part Number=C164886, Manufacturer=Comchip, Supplier Part Number=641-1790-1-ND, Category=Transistors, ComponentLink1Description=https://datasheet.ciiva.com:443/pdfs/VipMasterIC/IC/COMC/COMC-S-A0004994192/COMC-S-A0004994192-1.pdf?src-supplier=IHS+Markit, ComponentLink1URL=https://datasheet.ciiva.com:443/pdfs/VipMasterIC/IC/COMC/COMC-S-A0004994192/COMC-S-A0004994192-1.pdf?src-supplier=IHS+Markit, ComponentLink2Description="http://www.comchiptech.com/admin/files/product/SS8050-G RevA181526.pdf?src-supplier=Digikey", ComponentLink2URL="http://www.comchiptech.com/admin/files/product/SS8050-G RevA181526.pdf?src-supplier=Digikey", Manufacturer Part Number=SS8050-G, Pricing="1=0.17, 10=0.113, 100=0.0755, 500=0.05756, 1000=0.05148 (USD)", Reach SVHC Compliant=Yes, RoHS=Yes, RoHS Compliant=Yes, Stock=92980, Supplier=Digikey
R1 R2 R3 R8 R19 R20 R23 R24 R25 R26: library part RC0402JR-070RL, "RES 0 OHM JUMPER 1/16W 0402", Case/Package=0402, LCSC Part Number=C60485, Manufacturer=Yageo, Max Operating Temperature=155°C, Min Operating Temperature=-55°C, Package Height=0.35mm, Package Length=1mm, Package Shape=Rectangular, Package Style=SMTMeter, Package Width=0.5mm, Power=62.5mW, Rated Temperature=70°C, Resistor Type="FIXED RESISTOR", Supplier Part Number=311-0.0JRCT-ND, Category="Chip SMD Resistors", ComponentLink1Description=https://datasheet.ciiva.com:443/pdfs/VipMasterIC/IC/YAGO/YAGO-S-A0008145938/YAGO-S-A0008145938-1.pdf?src-supplier=IHS+Markit, ComponentLink1URL=https://datasheet.ciiva.com:443/pdfs/VipMasterIC/IC/YAGO/YAGO-S-A0008145938/YAGO-S-A0008145938-1.pdf?src-supplier=IHS+Markit, ComponentLink2Description=https://datasheet.ciiva.com/2452/pyu-rc0402-51-rohs-l-6-2452608.pdf?src-supplier=Digikey, ComponentLink2URL=https://datasheet.ciiva.com/2452/pyu-rc0402-51-rohs-l-6-2452608.pdf?src-supplier=Digikey, ComponentLink3Description=https://datasheet.ciiva.com/11808/0900766b80c66297-11808195.pdf?src-supplier=Rs, ComponentLink3URL=https://datasheet.ciiva.com/11808/0900766b80c66297-11808195.pdf?src-supplier=Rs, ComponentLink4Description=https://datasheet.ciiva.com/2452/pyu-r-int-thick-7-2452609.pdf?src-supplier=Digikey, ComponentLink4URL=https://datasheet.ciiva.com/2452/pyu-r-int-thick-7-2452609.pdf?src-supplier=Digikey, ComponentLink5Description=https://datasheet.ciiva.com/2452/pyu-r-int-thick-7-2452610.pdf?src-supplier=Digikey, ComponentLink5URL=https://datasheet.ciiva.com/2452/pyu-r-int-thick-7-2452610.pdf?src-supplier=Digikey, ComponentLink6Description=https://datasheet.ciiva.com/8896/pyu-rc0402-51-rohs-l-6-8896201.pdf?src-supplier=Avnet, ComponentLink6URL=https://datasheet.ciiva.com/8896/pyu-rc0402-51-rohs-l-6-8896201.pdf?src-supplier=Avnet, ComponentLink7Description=https://datasheet.ciiva.com/7983/1018594-7983535.pdf?src-supplier=Element14, ComponentLink7URL=https://datasheet.ciiva.com/7983/1018594-7983535.pdf?src-supplier=Element14, ComponentLink8Description=https://datasheet.ciiva.com/22747/1018594-22747515.pdf?src-supplier=Element14, ComponentLink8URL=https://datasheet.ciiva.com/22747/1018594-22747515.pdf?src-supplier=Element14, Construction=Chip, JESD-609 Code=e3, Manufacturer Part Number=RC0402JR-070RL, Mounting Technology="Surface Mount", Packaging="Tape and Reel", Pins=2, Pricing="1=0.1, 10=0.007, 100=0.0051, 250=0.00304, 5000=0.00204, 10000=0.00204, 20000=0.00139, 30000=0.0013, 50000=0.00111, 500000=0.001 (USD)", Reach SVHC Compliant=Yes, RoHS=Yes, RoHS Compliant=Yes, Stock=14388333, Supplier=Digikey, Technology="METAL GLAZE/THICK FILM", Terminal Finish=Nickel, Termination=Wraparound
R4 R7 R21 R22: library part RC0402FR-0727RL, "RES 27 OHM 1% 1/16W 0402", Case/Package=0402, LCSC Part Number=C138021, Manufacturer=Yageo, Max Operating Temperature=155°C, Min Operating Temperature=-55°C, Package Height=0.35mm, Package Length=1mm, Package Shape=Rectangular, Package Style=SMTMeter, Package Width=0.5mm, Power=62.5mW, Rated Temperature=70°C, Resistor Type="FIXED RESISTOR", Supplier Part Number=YAG3086CT-ND, Temperature Coefficient=100ppm/°C, Tolerance=1%, Working Voltage=50V, Additional Feature="LASER TRIMMABLE", Category="Chip SMD Resistors", ComponentLink1Description=https://datasheet.ciiva.com:443/pdfs/VipMasterIC/IC/YAGO/YAGO-S-A0008145938/YAGO-S-A0008145938-1.pdf?src-supplier=IHS+Markit, ComponentLink1URL=https://datasheet.ciiva.com:443/pdfs/VipMasterIC/IC/YAGO/YAGO-S-A0008145938/YAGO-S-A0008145938-1.pdf?src-supplier=IHS+Markit, ComponentLink2Description=https://datasheet.ciiva.com/11808/0900766b80c66297-11808450.pdf?src-supplier=Rs, ComponentLink2URL=https://datasheet.ciiva.com/11808/0900766b80c66297-11808450.pdf?src-supplier=Rs, ComponentLink3Description=https://datasheet.ciiva.com/15189/getdatasheetpartid-327852-15189402.pdf?src-supplier=Verical, ComponentLink3URL=https://datasheet.ciiva.com/15189/getdatasheetpartid-327852-15189402.pdf?src-supplier=Verical, ComponentLink4Description=https://datasheet.ciiva.com/7849/1018594-7849926.pdf?src-supplier=Element14, ComponentLink4URL=https://datasheet.ciiva.com/7849/1018594-7849926.pdf?src-supplier=Element14, ComponentLink5Description=https://datasheet.ciiva.com/7849/1018594-7849927.pdf?src-supplier=Element14, ComponentLink5URL=https://datasheet.ciiva.com/7849/1018594-7849927.pdf?src-supplier=Element14, ComponentLink6Description=https://datasheet.ciiva.com/17044/pyu-rc0402-51-rohs-l-6-17044345.pdf?src-supplier=Future+Electronics, ComponentLink6URL=https://datasheet.ciiva.com/17044/pyu-rc0402-51-rohs-l-6-17044345.pdf?src-supplier=Future+Electronics, Construction=Chip, JESD-609 Code=e3, Manufacturer Part Number=RC0402FR-0727RL, Mounting Technology="Surface Mount", Packaging="Tape and Reel", Pins=2, Pricing="1=0.1, 10=0.009, 50=0.0072, 500=0.0051, 5000=0.00306 (USD)", Reach SVHC Compliant=Yes, RoHS=Yes, RoHS Compliant=Yes, Stock=352213, Supplier=Digikey, Technology="METAL GLAZE/THICK FILM", Terminal Finish=Nickel, Termination=Wraparound
R5 R6: library part RC0402FR-071KL, "RES 1K OHM 1% 1/16W 0402", Case/Package=0402, LCSC Part Number=C106235, Manufacturer=Yageo, Max Operating Temperature=155°C, Min Operating Temperature=-55°C, Package Height=0.35mm, Package Length=1mm, Package Shape=Rectangular, Package Style=SMTMeter, Package Width=0.5mm, Power=62.5mW, Rated Temperature=70°C, Resistor Type="FIXED RESISTOR", Supplier Part Number=311-1.00KLRCT-ND, Temperature Coefficient=100ppm/°C, Tolerance=1%, Working Voltage=50V, Additional Feature="LASER TRIMMABLE", Category="Chip SMD Resistors", ComponentLink1Description=https://datasheet.ciiva.com:443/pdfs/VipMasterIC/IC/YAGO/YAGO-S-A0008145938/YAGO-S-A0008145938-1.pdf?src-supplier=IHS+Markit, ComponentLink1URL=https://datasheet.ciiva.com:443/pdfs/VipMasterIC/IC/YAGO/YAGO-S-A0008145938/YAGO-S-A0008145938-1.pdf?src-supplier=IHS+Markit, ComponentLink2Description=https://datasheet.ciiva.com/11819/0900766b80c66297-11819477.pdf?src-supplier=Rs, ComponentLink2URL=https://datasheet.ciiva.com/11819/0900766b80c66297-11819477.pdf?src-supplier=Rs, ComponentLink3Description=https://datasheet.ciiva.com/7849/1018594-7849869.pdf?src-supplier=Element14, ComponentLink3URL=https://datasheet.ciiva.com/7849/1018594-7849869.pdf?src-supplier=Element14, ComponentLink4Description=https://datasheet.ciiva.com/7849/1018594-7849871.pdf?src-supplier=Element14, ComponentLink4URL=https://datasheet.ciiva.com/7849/1018594-7849871.pdf?src-supplier=Element14, ComponentLink5Description=https://datasheet.ciiva.com/7983/1018594-7983502.pdf?src-supplier=Element14, ComponentLink5URL=https://datasheet.ciiva.com/7983/1018594-7983502.pdf?src-supplier=Element14, ComponentLink6Description=https://datasheet.ciiva.com/22747/1018594-22747513.pdf?src-supplier=Element14, ComponentLink6URL=https://datasheet.ciiva.com/22747/1018594-22747513.pdf?src-supplier=Element14, ComponentLink7Description=https://datasheet.ciiva.com/17063/pyu-rc0402-51-rohs-l-6-r-17063193.pdf?src-supplier=Future+Electronics, ComponentLink7URL=https://datasheet.ciiva.com/17063/pyu-rc0402-51-rohs-l-6-r-17063193.pdf?src-supplier=Future+Electronics, ComponentLink8Description=https://datasheet.ciiva.com/12666/pyu-rc0402-51-rohs-l-6-r-12666741.pdf?src-supplier=Mouser, ComponentLink8URL=https://datasheet.ciiva.com/12666/pyu-rc0402-51-rohs-l-6-r-12666741.pdf?src-supplier=Mouser, Construction=Chip, JESD-609 Code=e3, Manufacturer Part Number=RC0402FR-071KL, Mounting Technology="Surface Mount", Packaging="Tape and Reel", Pins=2, Pricing="1=0.1, 10=0.009, 50=0.0072, 500=0.00408, 5000=0.00306, 10000=0.00204, 20000=0.00178, 30000=0.00159, 50000=0.00148, 70000=0.00139 (USD)", Reach SVHC Compliant=Yes, RoHS=Yes, RoHS Compliant=Yes, Stock=6418972, Supplier=Digikey, Technology="METAL GLAZE/THICK FILM", Terminal Finish=Nickel, Termination=Wraparound
R9 R13 R16 R17 R18: library part AC0402FR-0710KL, "RES SMD 10K OHM 1% 1/16W 0402", Case/Package=0402, LCSC Part Number=C144807, Manufacturer=Yageo, Max Operating Temperature=155°C, Min Operating Temperature=-55°C, Package Height=0.32mm, Package Length=1mm, Package Shape=Rectangular, Package Style=SMTMeter, Package Width=0.5mm, Power=62.5mW, Rated Temperature=70°C, Resistor Type="FIXED RESISTOR", Supplier Part Number=YAG3436CT-ND, Temperature Coefficient=100ppm/°C, Tolerance=1%, Working Voltage=50V, Additional Feature="LASER TRIMMABLE", Category="Chip SMD Resistors", ComponentLink1Description=https://datasheet.ciiva.com:443/pdfs/VipMasterIC/IC/YAGO/YAGO-S-A0003597364/YAGO-S-A0003597364-1.pdf?src-supplier=IHS+Markit, ComponentLink1URL=https://datasheet.ciiva.com:443/pdfs/VipMasterIC/IC/YAGO/YAGO-S-A0003597364/YAGO-S-A0003597364-1.pdf?src-supplier=IHS+Markit, ComponentLink2Description=https://datasheet.ciiva.com/12656/pyu-ac-51-rohs-l-2-12656634.pdf?src-supplier=Mouser, ComponentLink2URL=https://datasheet.ciiva.com/12656/pyu-ac-51-rohs-l-2-12656634.pdf?src-supplier=Mouser, Construction=Chip, JESD-609 Code=e3, Manufacturer Part Number=AC0402FR-0710KL, Mounting Technology="Surface Mount", Packaging="Tape and Reel", Pins=2, Pricing="1=0.1, 10=0.012, 50=0.0096, 100=0.0071, 500=0.00612, 1000=0.0051, 5000=0.00408, 10000=0.00204, 20000=0.00194, 30000=0.00183 (USD)", Reach SVHC Compliant=Yes, Reference Standard=AEC-Q200, RoHS=Yes, RoHS Compliant=Yes, Stock=1443268, Supplier=Digikey, Technology="METAL GLAZE/THICK FILM", Terminal Finish=Nickel, Termination=Wraparound
R10: library part RC0402FR-074K7L, "RES 4.7K OHM 1% 1/16W 0402", Case/Package=0402, LCSC Part Number=C105871, Manufacturer=Yageo, Max Operating Temperature=155°C, Min Operating Temperature=-55°C, Package Height=0.35mm, Package Length=1mm, Package Shape=Rectangular, Package Style=SMTMeter, Package Width=0.5mm, Power=62.5mW, Rated Temperature=70°C, Resistor Type="FIXED RESISTOR", Supplier Part Number=311-4.7KLRCT-ND, Temperature Coefficient=100ppm/°C, Tolerance=1%, Working Voltage=50V, Additional Feature="LASER TRIMMABLE", Category="Chip SMD Resistors", ComponentLink1Description=https://datasheet.ciiva.com:443/pdfs/VipMasterIC/IC/YAGO/YAGO-S-A0008145938/YAGO-S-A0008145938-1.pdf?src-supplier=IHS+Markit, ComponentLink1URL=https://datasheet.ciiva.com:443/pdfs/VipMasterIC/IC/YAGO/YAGO-S-A0008145938/YAGO-S-A0008145938-1.pdf?src-supplier=IHS+Markit, ComponentLink2Description=https://datasheet.ciiva.com/22661/1686128-22661342.pdf?src-supplier=Element14, ComponentLink2URL=https://datasheet.ciiva.com/22661/1686128-22661342.pdf?src-supplier=Element14, ComponentLink3Description=https://datasheet.ciiva.com/7850/1018594-7850022.pdf?src-supplier=Element14, ComponentLink3URL=https://datasheet.ciiva.com/7850/1018594-7850022.pdf?src-supplier=Element14, ComponentLink4Description=https://datasheet.ciiva.com/7850/1018594-7850023.pdf?src-supplier=Element14, ComponentLink4URL=https://datasheet.ciiva.com/7850/1018594-7850023.pdf?src-supplier=Element14, ComponentLink5Description=https://datasheet.ciiva.com/15215/getdatasheetpartid-328119-15215035.pdf?src-supplier=Verical, ComponentLink5URL=https://datasheet.ciiva.com/15215/getdatasheetpartid-328119-15215035.pdf?src-supplier=Verical, Construction=Chip, JESD-609 Code=e3, Manufacturer Part Number=RC0402FR-074K7L, Mounting Technology="Surface Mount", Packaging="Tape and Reel", Pins=2, Pricing="1=0.1, 10=0.009, 50=0.0072, 500=0.00408, 5000=0.00306, 10000=0.00204, 20000=0.00178, 30000=0.00159, 50000=0.00148, 70000=0.00139 (USD)", Reach SVHC Compliant=Yes, RoHS=Yes, RoHS Compliant=Yes, Stock=3779537, Supplier=Digikey, Technology="METAL GLAZE/THICK FILM", Terminal Finish=Nickel, Termination=Wraparound
R11 R12 R14 R15: library part AC0402FR-075K1L, "RES SMD 5.1K OHM 1% 1/16W 0402", Case/Package=0402, LCSC Part Number=C144745, Manufacturer=Yageo, Max Operating Temperature=155°C, Min Operating Temperature=-55°C, Package Height=0.32mm, Package Length=1mm, Package Shape=Rectangular, Package Style=SMTMeter, Package Width=0.5mm, Power=62.5mW, Rated Temperature=70°C, Resistor Type="FIXED RESISTOR", Supplier Part Number=YAG3503CT-ND, Temperature Coefficient=100ppm/°C, Tolerance=1%, Working Voltage=50V, Additional Feature="LASER TRIMMABLE", Category="Chip SMD Resistors", ComponentLink1Description=https://datasheet.ciiva.com:443/pdfs/VipMasterIC/IC/YAGO/YAGO-S-A0003597364/YAGO-S-A0003597364-1.pdf?src-supplier=IHS+Markit, ComponentLink1URL=https://datasheet.ciiva.com:443/pdfs/VipMasterIC/IC/YAGO/YAGO-S-A0003597364/YAGO-S-A0003597364-1.pdf?src-supplier=IHS+Markit, ComponentLink2Description=http://www.yageo.com/NewPortal/yageodocoutput?fileName=/pdf/R-Chip/PYu-AC_51_RoHS_L_6.pdf&src-supplier=Digikey, ComponentLink2URL=http://www.yageo.com/NewPortal/yageodocoutput?fileName=/pdf/R-Chip/PYu-AC_51_RoHS_L_6.pdf&src-supplier=Digikey, ComponentLink3Description=http://www.yageo.com/documents/recent/PYu-AC_51_RoHS_L_2_revised.pdf?src-supplier=Future+Electronics, ComponentLink3URL=http://www.yageo.com/documents/recent/PYu-AC_51_RoHS_L_2_revised.pdf?src-supplier=Future+Electronics, ComponentLink4Description=https://datasheet.octopart.com/AC0402FR-075K1L-Yageo-datasheet-166720450.pdf?src-supplier=Future+Electronics, ComponentLink4URL=https://datasheet.octopart.com/AC0402FR-075K1L-Yageo-datasheet-166720450.pdf?src-supplier=Future+Electronics, Construction=Chip, JESD-609 Code=e3, Manufacturer Part Number=AC0402FR-075K1L, Mounting Technology="Surface Mount", Packaging="Tape and Reel", Pins=2, Pricing="1=0.1, 10=0.012, 50=0.0096, 100=0.0071, 500=0.00612, 1000=0.0051, 5000=0.00408 (USD)", Reach SVHC Compliant=Yes, Reference Standard=AEC-Q200, RoHS=Yes, RoHS Compliant=Yes, Stock=78450, Supplier=Digikey, Technology="METAL GLAZE/THICK FILM", Terminal Finish=Nickel, Termination=Wraparound
SW1 SW2: "SWITCH TACTILE SPST-NO 0.05A 12V", Contact Current(DC)-Max=50mA, Contact DC Max Rating R Load=0.05A@12VDC, Contact Resistance=0.1mR, Contact Voltage(DC)-Max=12V, Dielectric Withstand Volts=250VACV, Insulation Resistance=100GR, LCSC Part Number=C221869, Manufacturer="ITT C&K", Manufacturer Series=PTS645, Max Operating Temperature=60°C, Min Operating Temperature=-20°C, Supplier Part Number=CKN9085CT-ND, Actuator Type=Pushbutton, Body Breadth=5.9944inch, Body Height=3.4544mm, Body Length or Diameter=5.9944mm, Category="Tactile Switches", ComponentLink1Description=https://datasheet.ciiva.com:443/pdfs/VipMasterIC/IC/CKCI/CKCI-S-A0001796527/CKCI-S-A0001796842-1.pdf?src-supplier=IHS+Markit, ComponentLink1URL=https://datasheet.ciiva.com:443/pdfs/VipMasterIC/IC/CKCI/CKCI-S-A0001796527/CKCI-S-A0001796842-1.pdf?src-supplier=IHS+Markit, ComponentLink2Description=https://datasheet.ciiva.com/29903/getdatasheetpartid-773702-29903807.pdf?src-supplier=Verical, ComponentLink2URL=https://datasheet.ciiva.com/29903/getdatasheetpartid-773702-29903807.pdf?src-supplier=Verical, ComponentLink3Description=https://datasheet.ciiva.com/22637/1707731-22637356.pdf?src-supplier=Element14, ComponentLink3URL=https://datasheet.ciiva.com/22637/1707731-22637356.pdf?src-supplier=Element14, ComponentLink4Description=https://datasheet.ciiva.com/14920/pts645-14920741.pdf?src-supplier=Digikey, ComponentLink4URL=https://datasheet.ciiva.com/14920/pts645-14920741.pdf?src-supplier=Digikey, Electrical Life=100000Cycles, JESD-609 Code=e4, Manufacturer Part Number=PTS645SH50SMTR92LFS, Mounting Technology="Surface Mount", PCB Hole Count=4, Pricing="1=0.4, 10=0.324, 25=0.2984, 100=0.2633, 250=0.24204, 500=0.22698 (USD)", Reach SVHC Compliant=Yes, RoHS=Yes, RoHS Compliant=Yes, Stock=36738, Supplier=Digikey, Switch Action=MOMENTARY, Switch Function=SPST, Switch Type=Keypad, Terminal Finish=Silver, Terminal Length=0.138inch, Termination=Solder